# Altium PCB AC_fan.PcbDoc
Units mm, origin at the board's own origin, x right, y up, seen from the top; angles counter-clockwise.
Board outline 20 x 43.1 mm, 2 copper layers (Top Layer, Bottom Layer); 9 components, 8 nets, 21 pads, 0 vias.
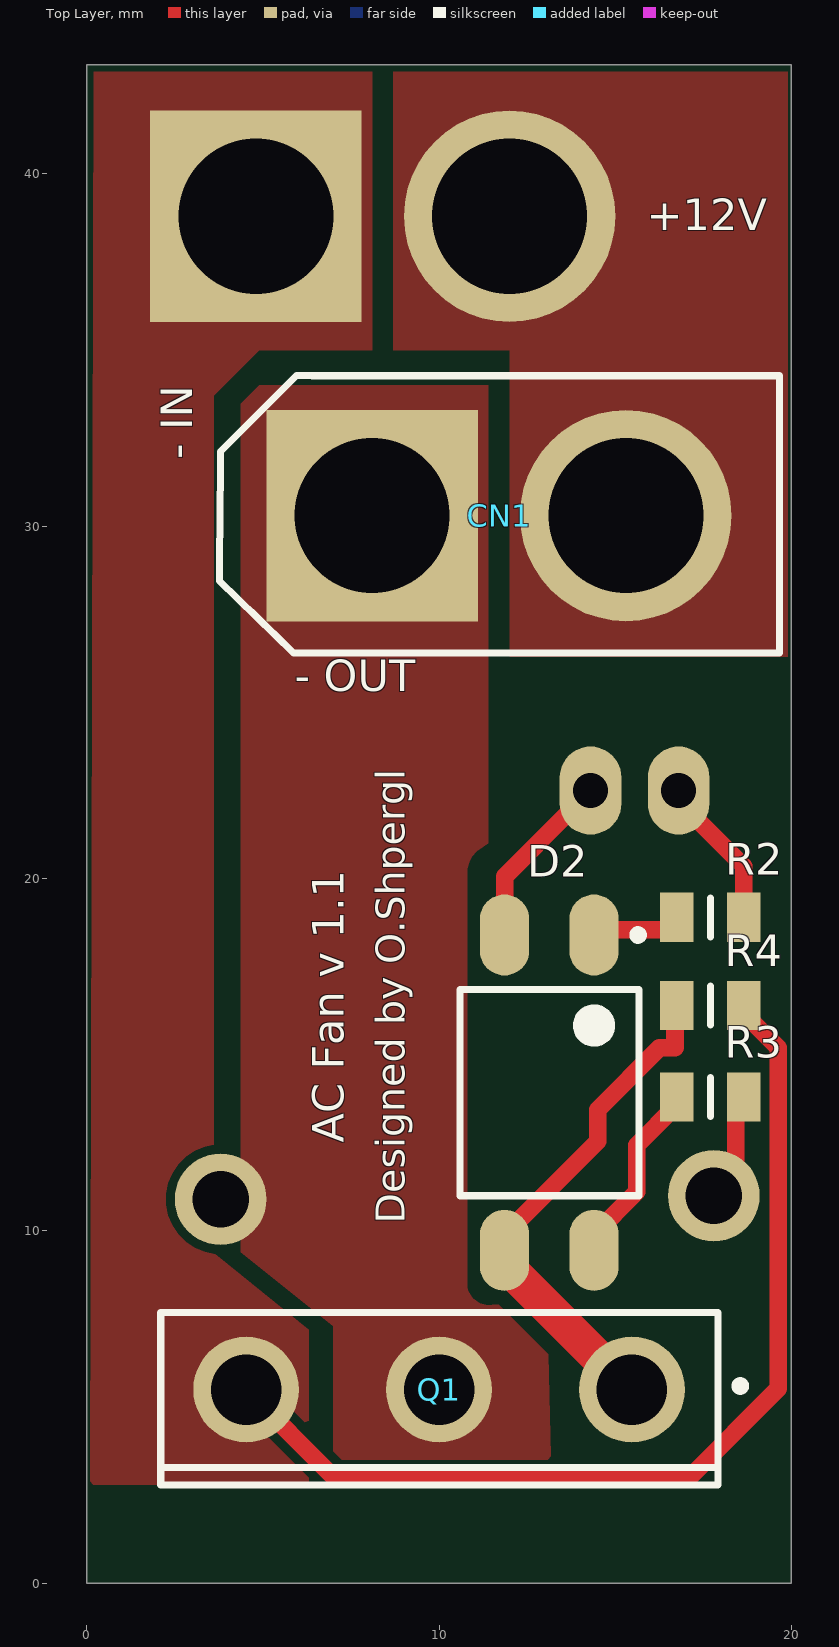
[diagram p0: Top Layer view]
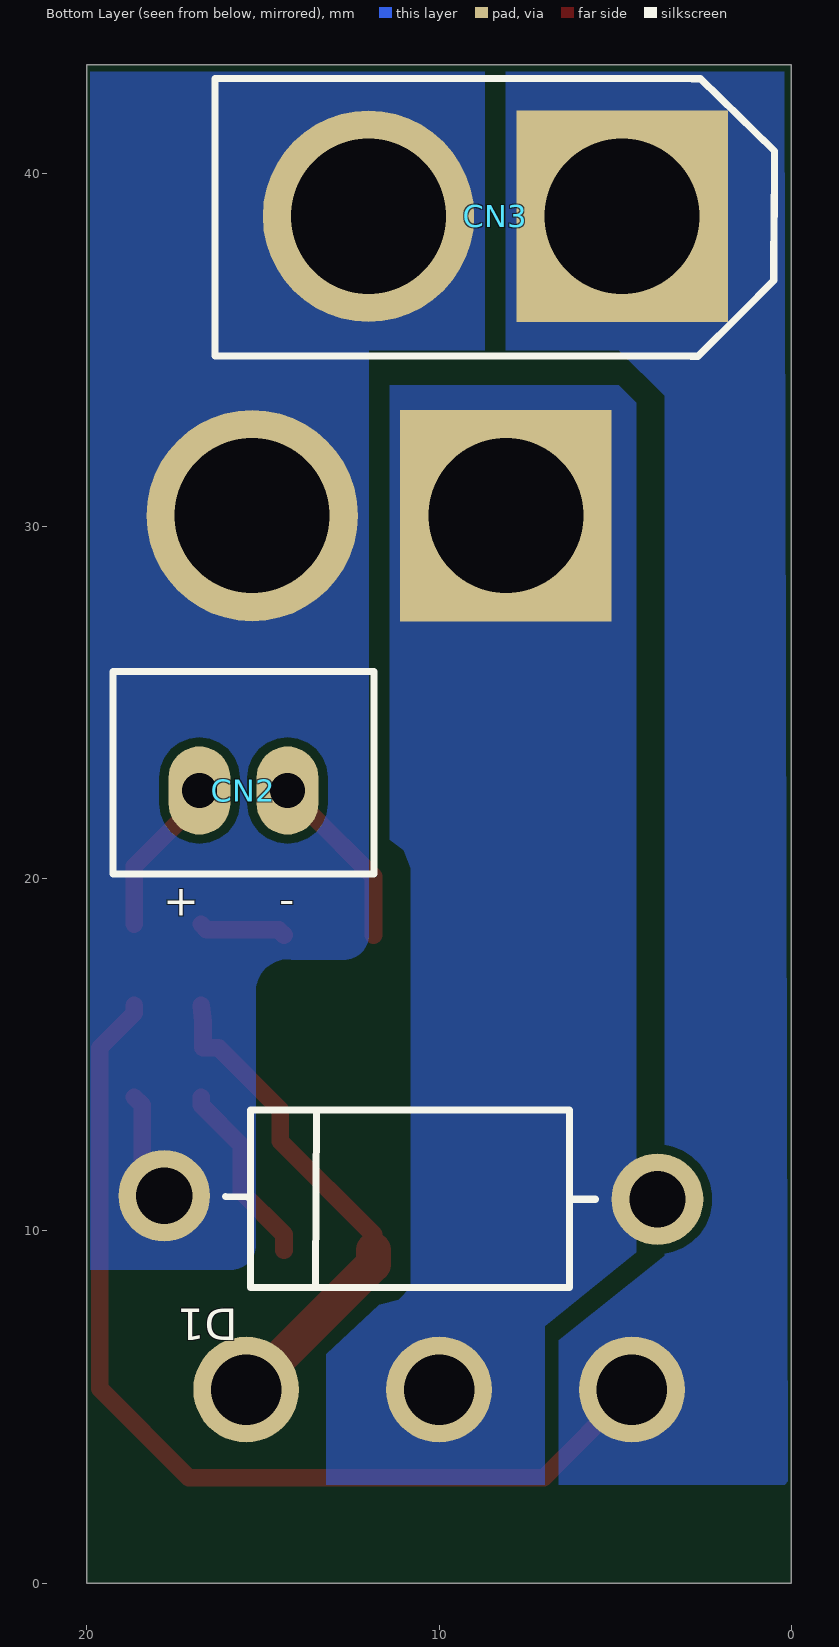
[diagram p1: Bottom Layer view, seen from below]
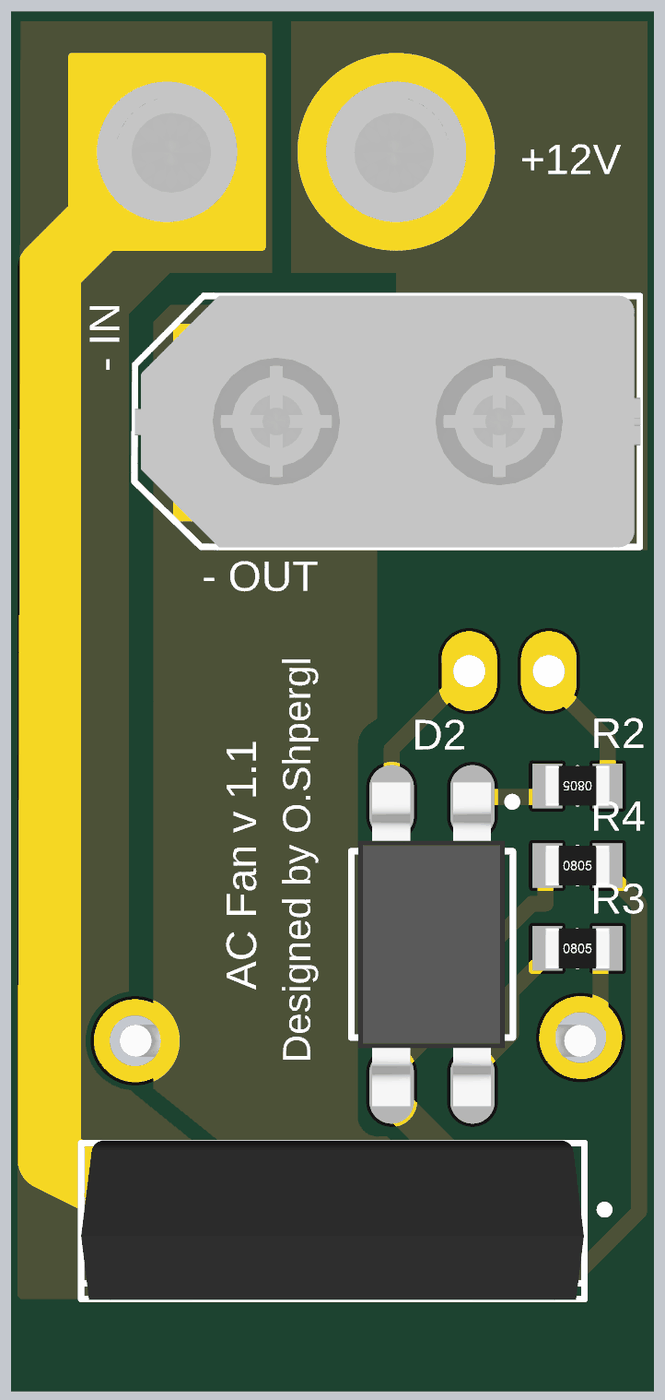
[diagram p2: 3D render of the assembled board from above, using the file's embedded part models]
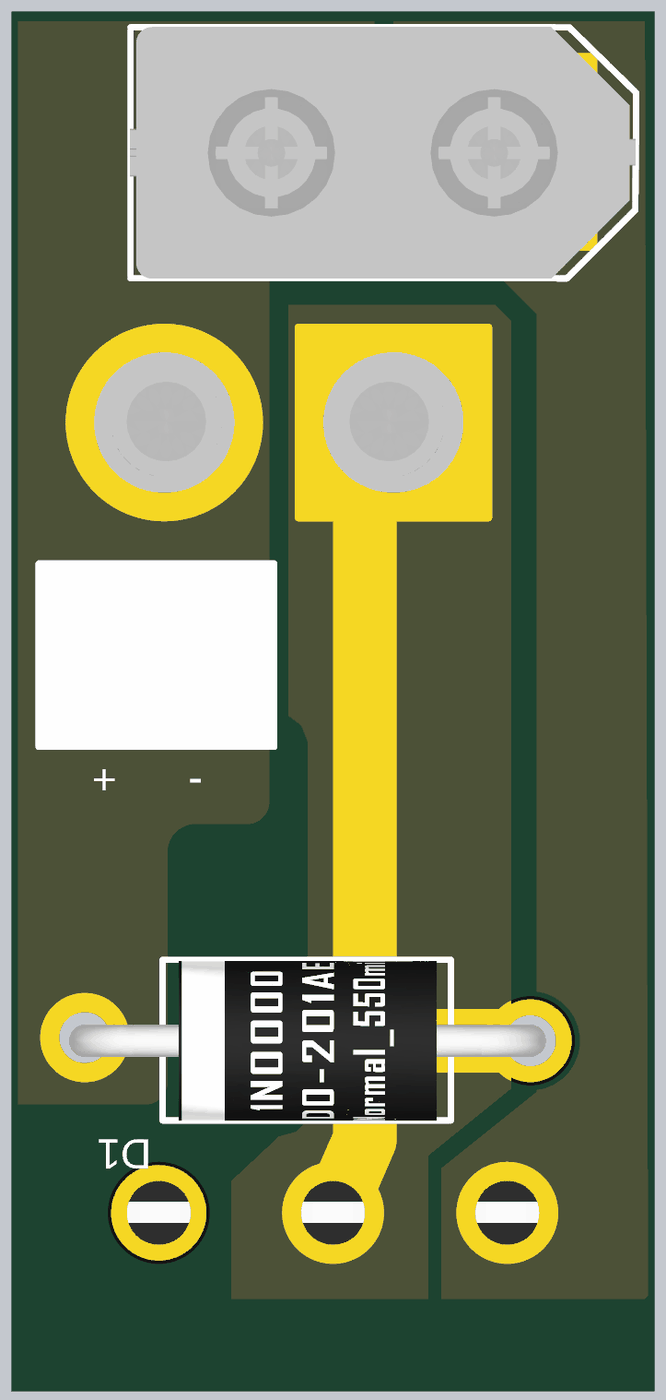
[diagram p3: 3D render of the assembled board from below, using the file's embedded part models]

## Layer stack, top to bottom
Top Solder: solder mask 0.0102, Solder Resist, Dk 3.5
Top Layer: signal copper 0.0356
Dielectric 1: dielectric 0.32, FR-4, Dk 4.8
Bottom Layer: signal copper 0.0356
Bottom Solder: solder mask 0.0102, Solder Resist, Dk 3.5

## Board outline
0,0 20,0 20,43.1 0,43.1

## Design rules (kind name [scope] priority, off if disabled: settings)
Clearance [All] p1: gap=0.254 ignorepadtopadclearanceinfootprint=FALSE except(0: Arc-Hole Track-Hole SMDPad-Hole THPad-Hole Via-Hole Fill-Hole Poly-Hole Region-Hole Text-Hole)
Height [All] p1: minheight=0 maxheight=30 prefheight=12.7
HoleSize [All] p1: absolutevalues=TRUE maxlimit=5 minlimit=0.025 maxpercent=80.000 minpercent=20.000
PolygonConnect [All] p1 off: connectstyle=Relief reliefconductorwidth=0.254 reliefentries=4 polygonreliefangle="90 Angle" airgapwidth=0.254
PolygonConnect PolygonConnect_1 [All] p2: connectstyle=Direct reliefconductorwidth=0.254 reliefentries=4 polygonreliefangle="90 Angle" airgapwidth=0.254
RoutingVias [All] p1: holewidth=0.711 width=1.27 viastyle="Through Hole" minholewidth=0.711 minwidth=1.27 maxholewidth=0.711 maxwidth=1.27
SolderMaskExpansion [All] p1: expansion=0.102 istentingtop=FALSE
Width [All] p1: maxlimit=3 minlimit=0.254 preferedwidth=0.254
28 further rules are at their usual default settings.

## Components (designator, comment, footprint, x,y, rotation, side; value= is the part's Value field where it differs from the comment)
CN1 "CN_2pin_XT60PW-M" CN_2PIN_XT60-M 11.7,30.3 r0 top
CN2 "CN_1X2M" CN_XH2.54-2P-MALE 14.3,22.5 r0 bottom
CN3 "CN_2pin_XT60PW-M" CN_2PIN_XT60-M 8.4,38.8 r0 bottom locked
D1 "DIO" DO-201AD-HORIZONTAL 10.813,10.95 r0 bottom
D2 "IC_LiteOn_LTV817" "IC_LiteOn_ LTV-817S" 13.13,13.925 r270 top
Q1 "TRS_IRFP2907PbF" TO-247AC 10,5.251 r270 top
R2 "RES" RESC2012X60N 17.7,18.9 r180 top
R3 "RES" RESC2012X60N 17.7,13.8 r0 top
R4 "RES" RESC2012X60N 17.7,16.4 r0 top

## Footprints (in the part's own frame and the unit in brackets; to place one, negate y for a bottom-side part, rotate by r counter-clockwise, add the part's x,y. Pads: shape width x height; smd on the part's side, far side on the other; paste and mask are expansions set on the pad)
CN_2PIN_XT60-M [mm]
  rect 6x6 hole 4.4: 1(-3.598,0.002)
  round 6 hole 4.4: 2(3.602,0.002)
  silkscreen extent -7.93,-3.9 7.96,3.98, body extent -7.91,-3.92 7.99,3.98, height 16.1
CN_XH2.54-2P-MALE [mm]
  oval 1.75x2.5 hole 1: 1(0,0) 2(2.5,0)
  silkscreen extent -2.45,-3.38 4.95,2.38, body extent -2.45,-3.37 4.95,2.38, height 7
DO-201AD-HORIZONTAL [mm] "Schottky Diodes & Rectifiers 3 Amp 30 Volt"
  round 2.6 hole 1.6: 1(-7.013,0.05) 2(6.987,-0.05)
  silkscreen extent -5.25,-2.49 5.25,2.55, body extent -7.5,-2.45 7.47,2.55, height 6
"IC_LiteOn_ LTV-817S" [mm]
  oval 2.3x1.4 smd: 1(-4.475,1.27) 2(-4.475,-1.27) 3(4.475,-1.27) 4(4.475,1.27)
  silkscreen extent -4.6,-2.54 2.93,2.65, body extent -5.08,-2.31 5.08,2.29, height 3.74
RESC2012X60N [mm]
  rect 0.95x1.4 smd: 1(-0.95,0) 2(0.95,0)
  silkscreen extent 0,-0.55 0,0.55, body extent -1,-0.62 1,0.63, height 0.6
TO-247AC [mm]
  round 3 hole 2: 1(-0.249,5.475) 2(-0.249,0) 3(-0.249,-5.475)
  silkscreen extent -2.44,-7.9 2.46,8.68, body extent -2.52,-7.9 2.5,7.9, height 26.3

## Part data
CN1 CN3: library part 02_10140, "30A, 2 pin", Manufacturer=AMASS, Value1=XT60-M, Value2="2 pin", AutoId=182, ComponentLink1Description=Datasheet, ComponentLink1URL=X:\01_Datasheets\XT60.pdf, ComponentLink2Description=ComponentVerificationSheet, ComponentLink2URL=X:\02_ComponentVerificationSheets\, DeviceType=Connector_, Id=02_10140, MountType=SMT
CN2: library part 02_10135, Manufacturer="Joint Tech", Manufacturer PN=A2501WV-2P, Value1=NX2500-02SMS, Value2="2 pin", Value3=2.54mm, AutoId=176, ComponentLink1Description=Datasheet, ComponentLink1URL=X:\01_Datasheets\, ComponentLink2Description=ComponentVerificationSheet, ComponentLink2URL=X:\02_ComponentVerificationSheets\, DeviceType=Connector_, Id=02_10135, MountType=SMT
D1: library part 03_00101, "Schottky Diodes & Rectifiers 3 Amp 30 Volt", Manufacturer=Diodes, Manufacturer PN=1N5821, Value2="30Vr 3A", Value3=Schottky, AutoId=119, ComponentLink1Description=Datasheet, ComponentLink1URL=X:\01_Datasheets\1N5820.pdf, ComponentLink2Description=ComponentVerificationSheet, ComponentLink2URL=X:\02_ComponentVerificationSheets\, DeviceType=diode, Id=03_00101, Status="0 - Unchecked", SubType=Schottky, Value1=1N5821
D2: library part 07_00275, "Transistor Output Optocouplers Optocoupler Phototrans", Manufacturer=Lite-On, Manufacturer PN=LTV-817S, Supplier Part Number 1=859-LTV-817S, Value2=Optocouplers, AutoId=276, ComponentLink1Description=Datasheet, ComponentLink1URL=X:\01_Datasheets\IC_Lite_On_LTV-817S.pdf, ComponentLink2Description=ComponentVerificationSheet, ComponentLink2URL=X:\02_ComponentVerificationSheets\, DeviceType=Optocouple, Id=07_00275, MountType=SMT, Status="0 - Unchecked", Supplier 1=Mouser, Value1=LTV-817S, Value3=Optocouplers
Q1: library part 19_00049, "N-channel Power MOSFET Si 75V 209A 3-Pin(3+Tab)", Manufacturer="International Rectifier", Manufacturer PN=IRFP2907, Value1="IRFP2907PbF / w", Value2="75V, 209A", AutoId=56, ComponentLink1Description=Datasheet, ComponentLink1URL=X:\01_Datasheets\IRFP2907.pdf, ComponentLink2Description=ComponentVerificationSheet, ComponentLink2URL=X:\02_ComponentVerificationSheets\, DeviceType=transistor, Id=19_00049, MountType=SMT, Status="0 - Unchecked", SubType="N MOSFET"
R2: library part 15_00323, "RESISTOR, 0805, 330R, 1%, SMD", Manufacturer=Yageo, Manufacturer PN=RC0805FR-07330R, Supplier Part Number 1=9237429, Value1=330R, Value2=0W125, AutoId=323, ComponentLink1Description=Datasheet, ComponentLink1URL=X:\01_Datasheets\RES_YAGEO_RC0805FR.pdf, DeviceType=resistor, Id=15_00323, MountType=SMT, Status="2 - Checked and Approved", SubType="Metal film", Supplier 1=Farnell
R3 R4: library part 15_00341, "RESISTOR, 0805, 10K, 1%, SMD", Manufacturer=Yageo, Manufacturer PN=RC0805FR-0710K, Value1=10K, Value2=0W125, AutoId=341, ComponentLink1Description=Datasheet, ComponentLink1URL=X:\01_Datasheets\RES_YAGEO_RC0805FR.pdf, DeviceType=resistor, Id=15_00341, MountType=SMT, Status="0 - Unchecked", SubType="Metal film", Supplier 1=Farnell

## Nets (pads, with @x,y where several pads share a name; then routed paths per layer and width w, separated by ;. In a path a pad name is that pad's centre, name@x,y a point inside that pad or via, vN(x,y) a via of type N, cw(c..) or ccw(c..) an arc to the next point about the centre after c; other vN are vias at no path point)
GND-IN: CN3.1 Q1.3 R4.2 | length 28.5
  Top Layer w0.5: Q1.3 7.025,3 17.1,3 19.629,5.529 19.629,15.196 18.65,16.175 R4.2
GND-OUT: CN1.1 D1.1 Q1.2
NetCN2_1: CN2.1 D2.2 | length 5.1
  Top Layer w0.5: D2.2 11.86,20.06 13.686,21.886 13.723,21.886 14.3,22.463 CN2.1
NetCN2_2: CN2.2 R2.1 | length 4.6
  Top Layer w0.5: CN2.2 16.8,22.2 18.65,20.35 R2.1@18.65,18.7
NetD2_1: D2.1 R2.2 | length 2.5
  Top Layer w0.5: D2.1 14.55,18.55 16.6,18.55 R2.2@16.75,18.7
NetD2_4: D2.4 R3.1 | length 5.3
  Top Layer w0.5: D2.4 14.4,9.9 15.609,11.109 15.609,12.434 16.75,13.575 R3.1
TRS-Gate: D2.3 Q1.1 R4.1 | length 15.1
  Top Layer w0.5: D2.3 11.86,9.9 14.504,12.544 14.504,13.442 16.258,15.196 16.697,15.208 16.697,15.95 R4.1 R4.1@16.7,15.95
  Top Layer w1: D2.3 11.86,9.058 15.418,5.5 Q1.1
VCC-IN: CN1.2 CN3.2 D1.2 R3.2 | length 3
  Top Layer w0.5: D1.2@18.1,11 18.425,11.325 18.425,13.575 R3.2

## Polygon pours and split planes (outlines as drawn)
GND-OUT on Bottom Layer "GND-OUT_L02_P014" (solid, pour order 14): 11.4,34 4.9,34 4.4,33.5 4.4,9.4 7,7.3 7,2.8 13.2,2.8 13.2,6.5 11.7,7.9 11.15,8.05 10.8,8.4 10.8,20.3 11,20.8 11.4,21.1
VCC-IN on Bottom Layer "VCC-IN_L02_P005" (solid, pour order 5): 12.7,17.7 14.2,17.7 cw(c14.309,16.811) 15.2,16.9 15.2,9.6 ccw(c15.9,9.6) 15.9,8.9 19.9,8.9 19.9,42.9 8.7,42.9 8.7,35 12,35 12,18.4 ccw(c12.7,18.4)
GND-IN on Bottom Layer "GND-IN_L02_P008" (solid, pour order 8): 0.2,42.9 8.1,42.9 8.1,35 4.9,35 3.6,33.7 3.6,26.8 3.6,26.3 3.6,9.3 6.6,6.9 6.6,5.4 6.6,2.8 0.1,2.8
GND-IN on Top Layer "GND-IN_L01_P013" (solid, pour order 13): 8.1,42.9 8.1,42.7 8.1,35 4.9,35 3.6,33.7 3.6,9.4 3.7,9.3 6.3,7.2 6.3,2.8 0.1,2.8 0.2,42.9
GND-OUT on Top Layer "GND-OUT_L01_P012" (solid, pour order 12): 11.4,34 4.9,34 4.377,33.477 4.377,9.4 7,7.3 7,4.61 7,2.7 13.2,2.7 13.1,6.5 11.7,7.9 11.504,7.9 cw(c11.409,8.51) 10.8,8.41 10.8,19.5 10.8,20.18 cw(c11.585,20.18) 11.149,20.833 11.4,21
VCC-IN on Top Layer "VCC-IN_L01_P007" (solid, pour order 7): 8.7,42.9 19.9,42.9 19.9,26.3 12,26.3 12,35 8.7,35

## Silkscreen, mask and mechanical layers (free items; w line width, h text height)
Top Overlay:
  text "+12V" at 15.9,38.1 h1.52
  text "- IN" at 3.3,31.9 h1.52 r90
  text "- OUT" at 5.9,25.017 h1.52
  text "AC Fan v 1.1" at 7.6,12.5 h1.52 r90
  text "Designed by O.Shpergl" at 9.3,10.2 h1.4 r90
Bottom Overlay:
  text "-" at 14.1,18.707 h1.52
  text "+" at 16.8,18.642 h1.52
Top Solder:
  lines w2: 4.525,5.5 1.1,7.2 1.1,35.096 4.802,38.798
Bottom Solder:
  lines w2: 3.8,10.9 8.9,10.9 ; 9,28.4 9,7.8 10,5.5
Board:
  the board outline again, w0.2